# Altium PCB Adapter_UNIT_SPI_TO_INTAN.PcbDoc
Units mil, origin at the board's own origin, x right, y up, seen from the top; angles counter-clockwise.
Board outline 1700 x 695 mil, 4 copper layers (Top Layer, Layer 1, Layer 2, Bottom Layer), stack 29.356 mil thick; 4 components, 28 nets, 64 pads, 0 vias.
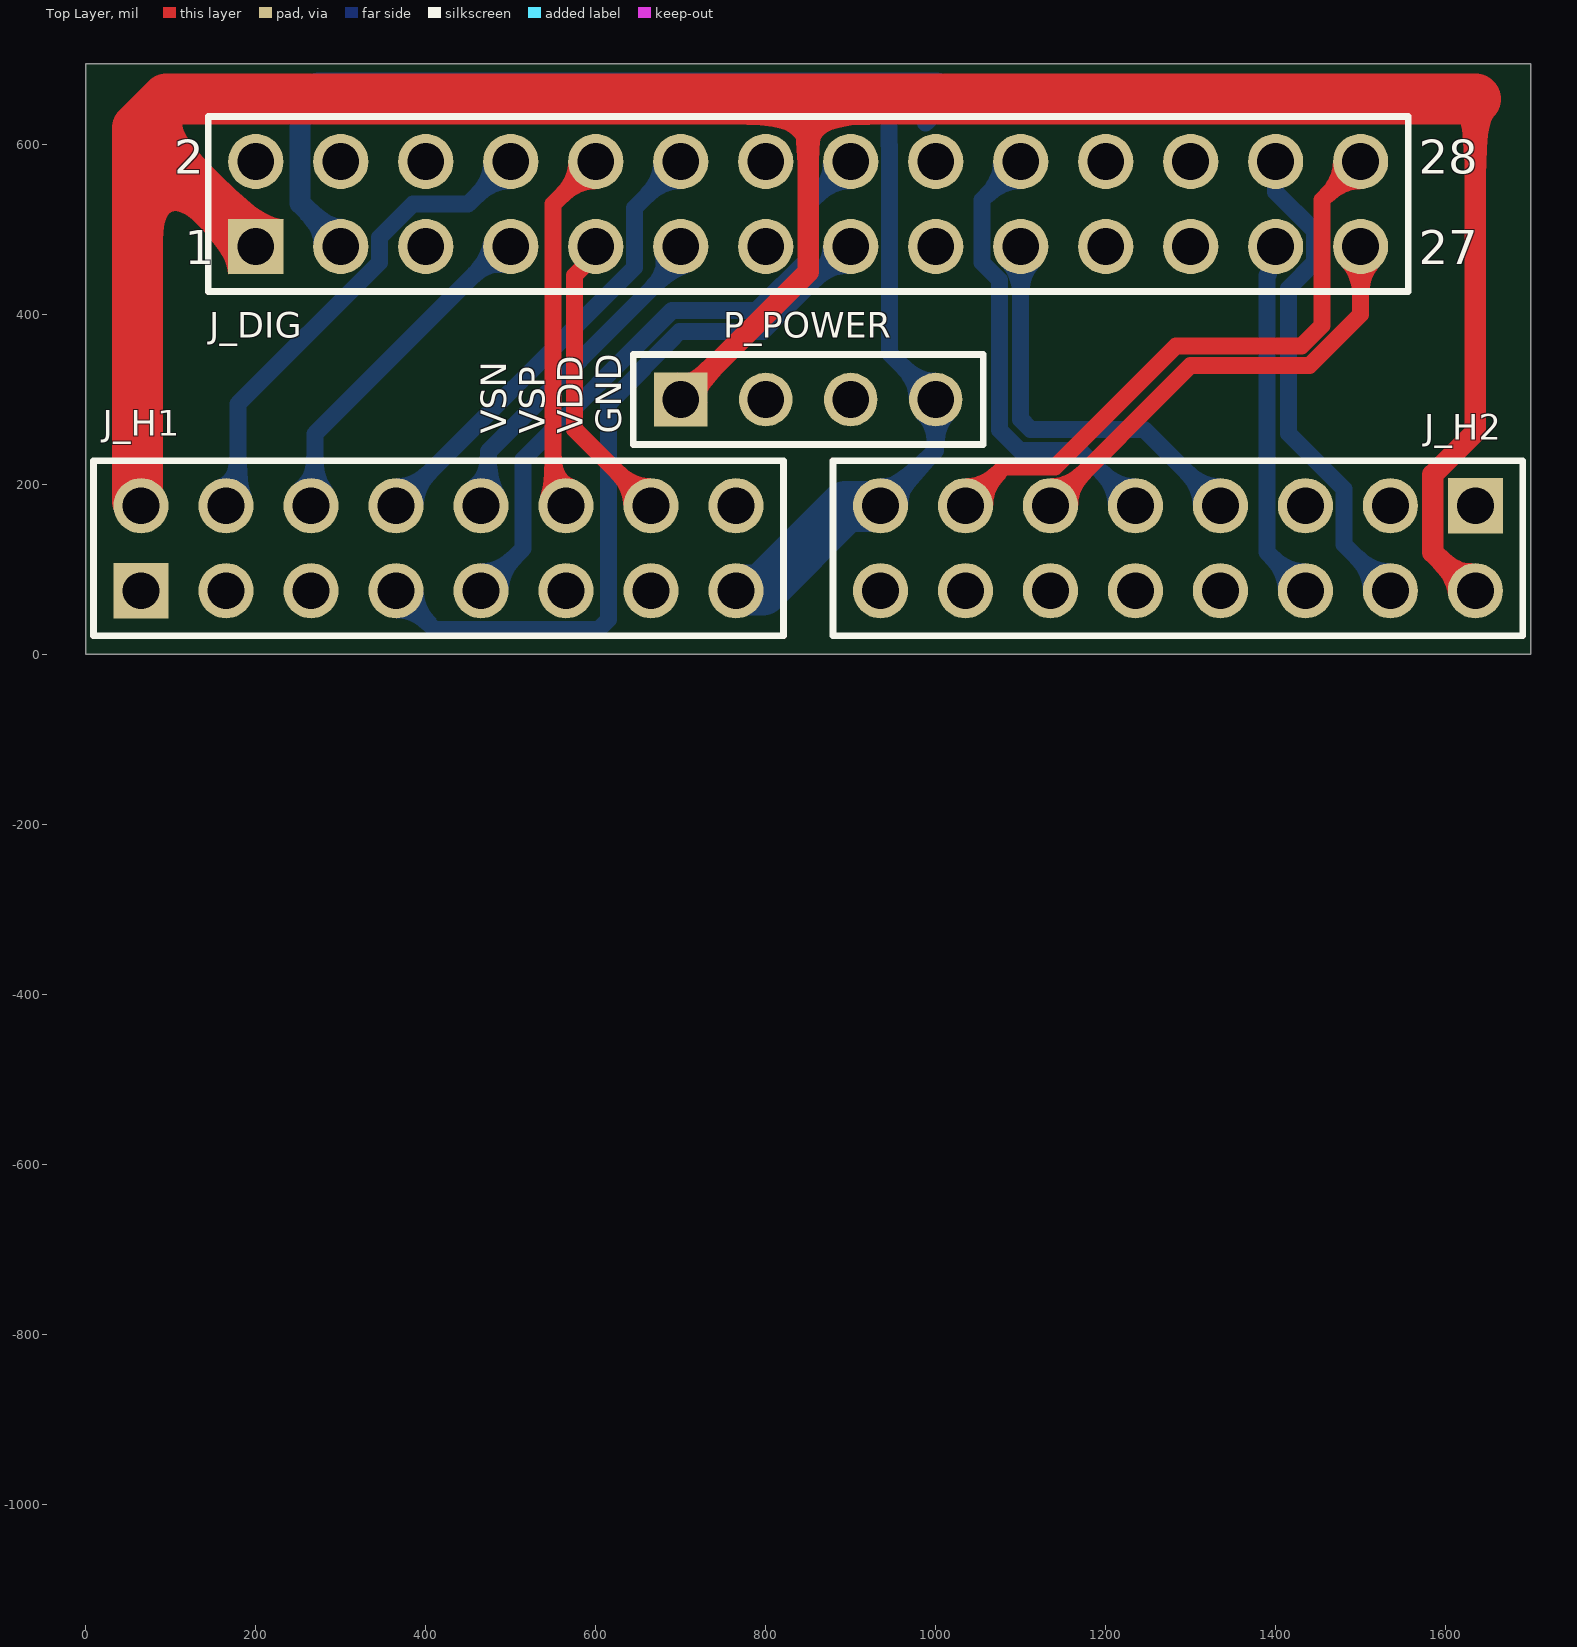
[diagram p0: Top Layer view]
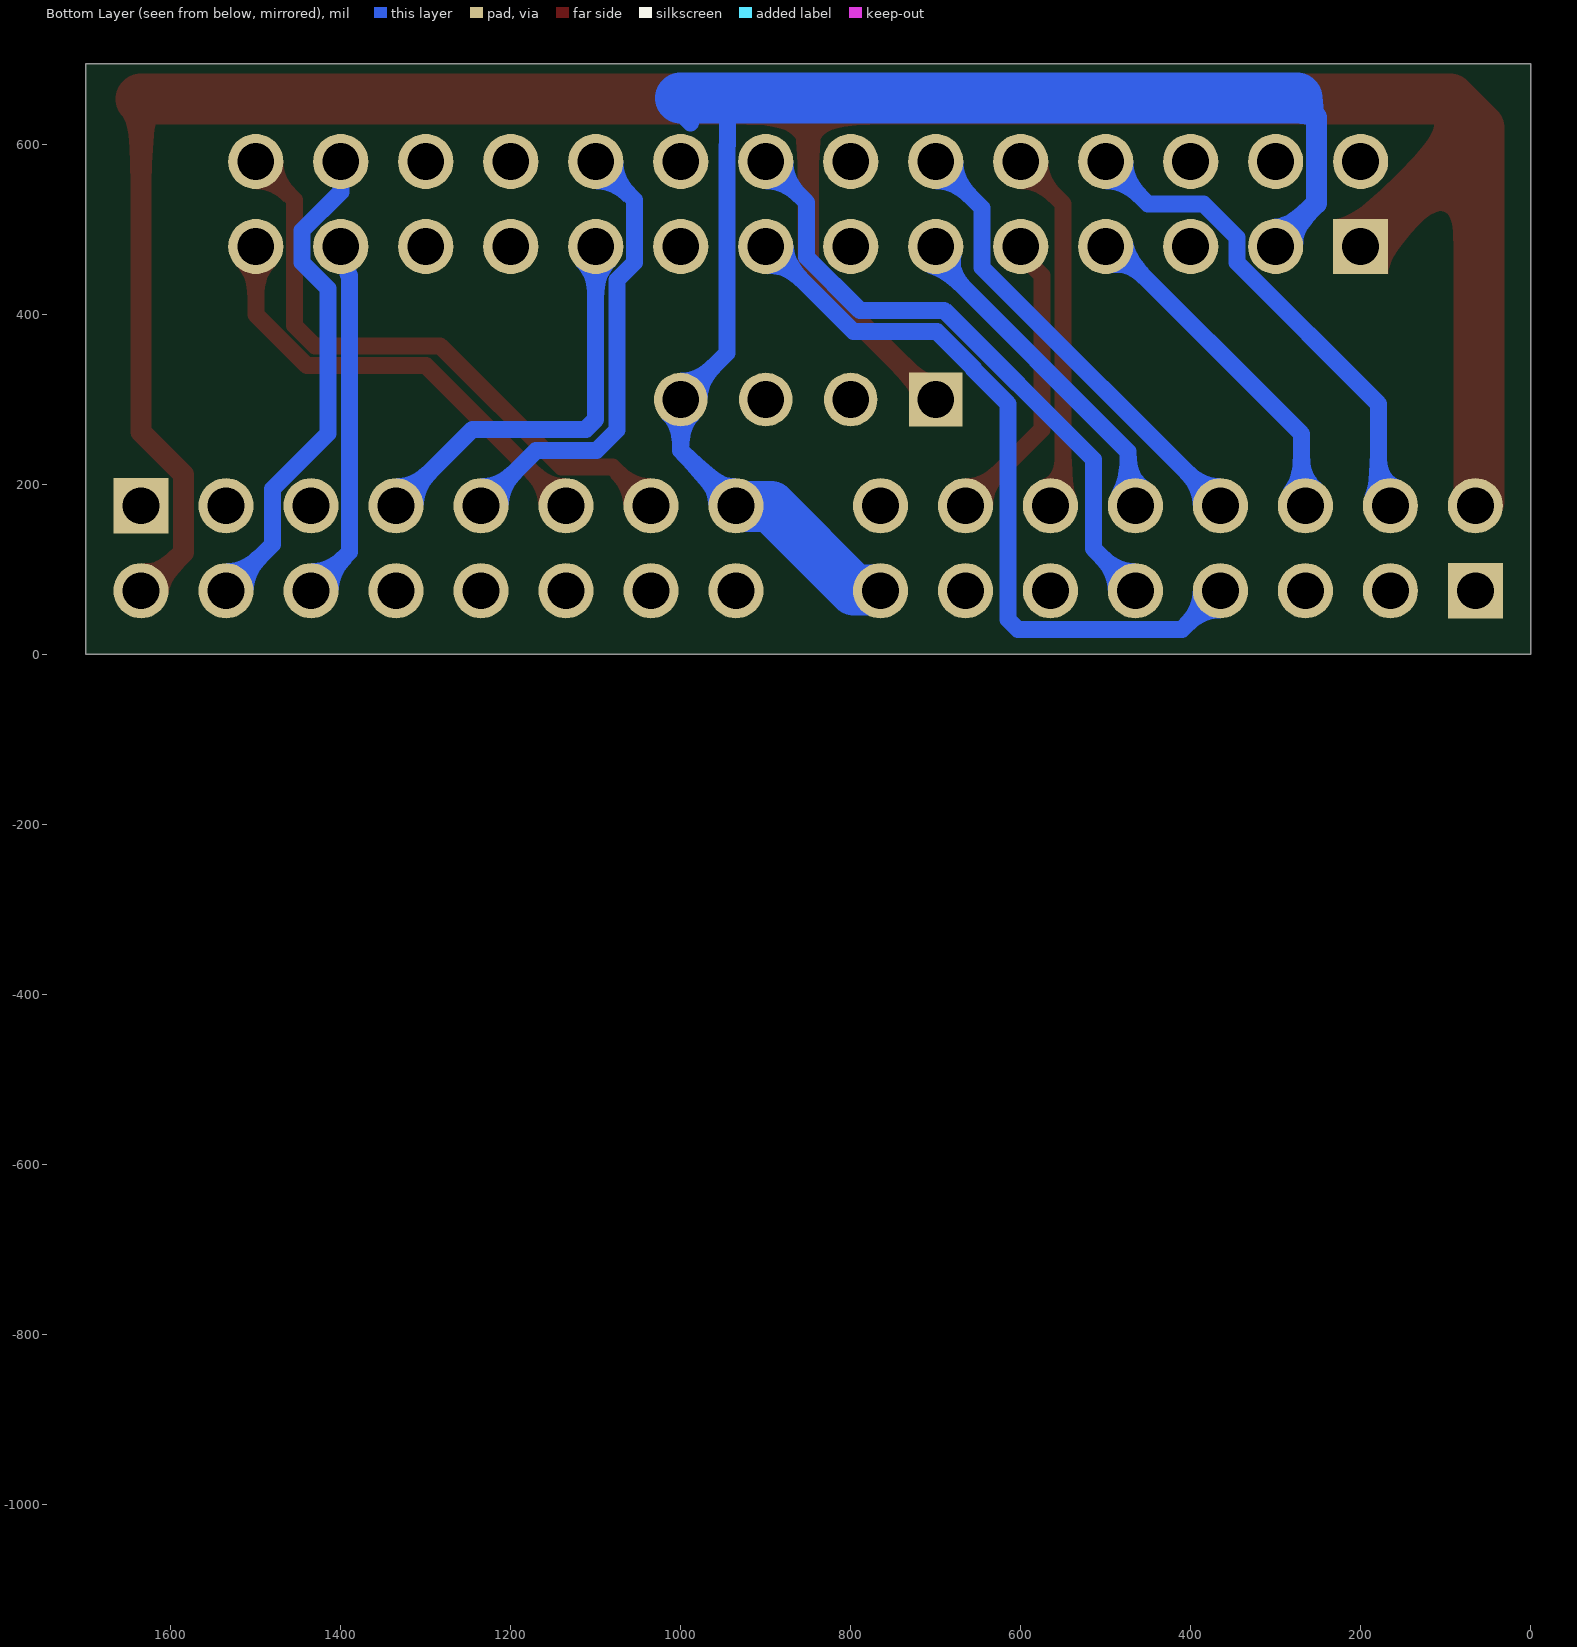
[diagram p1: Bottom Layer view, seen from below]
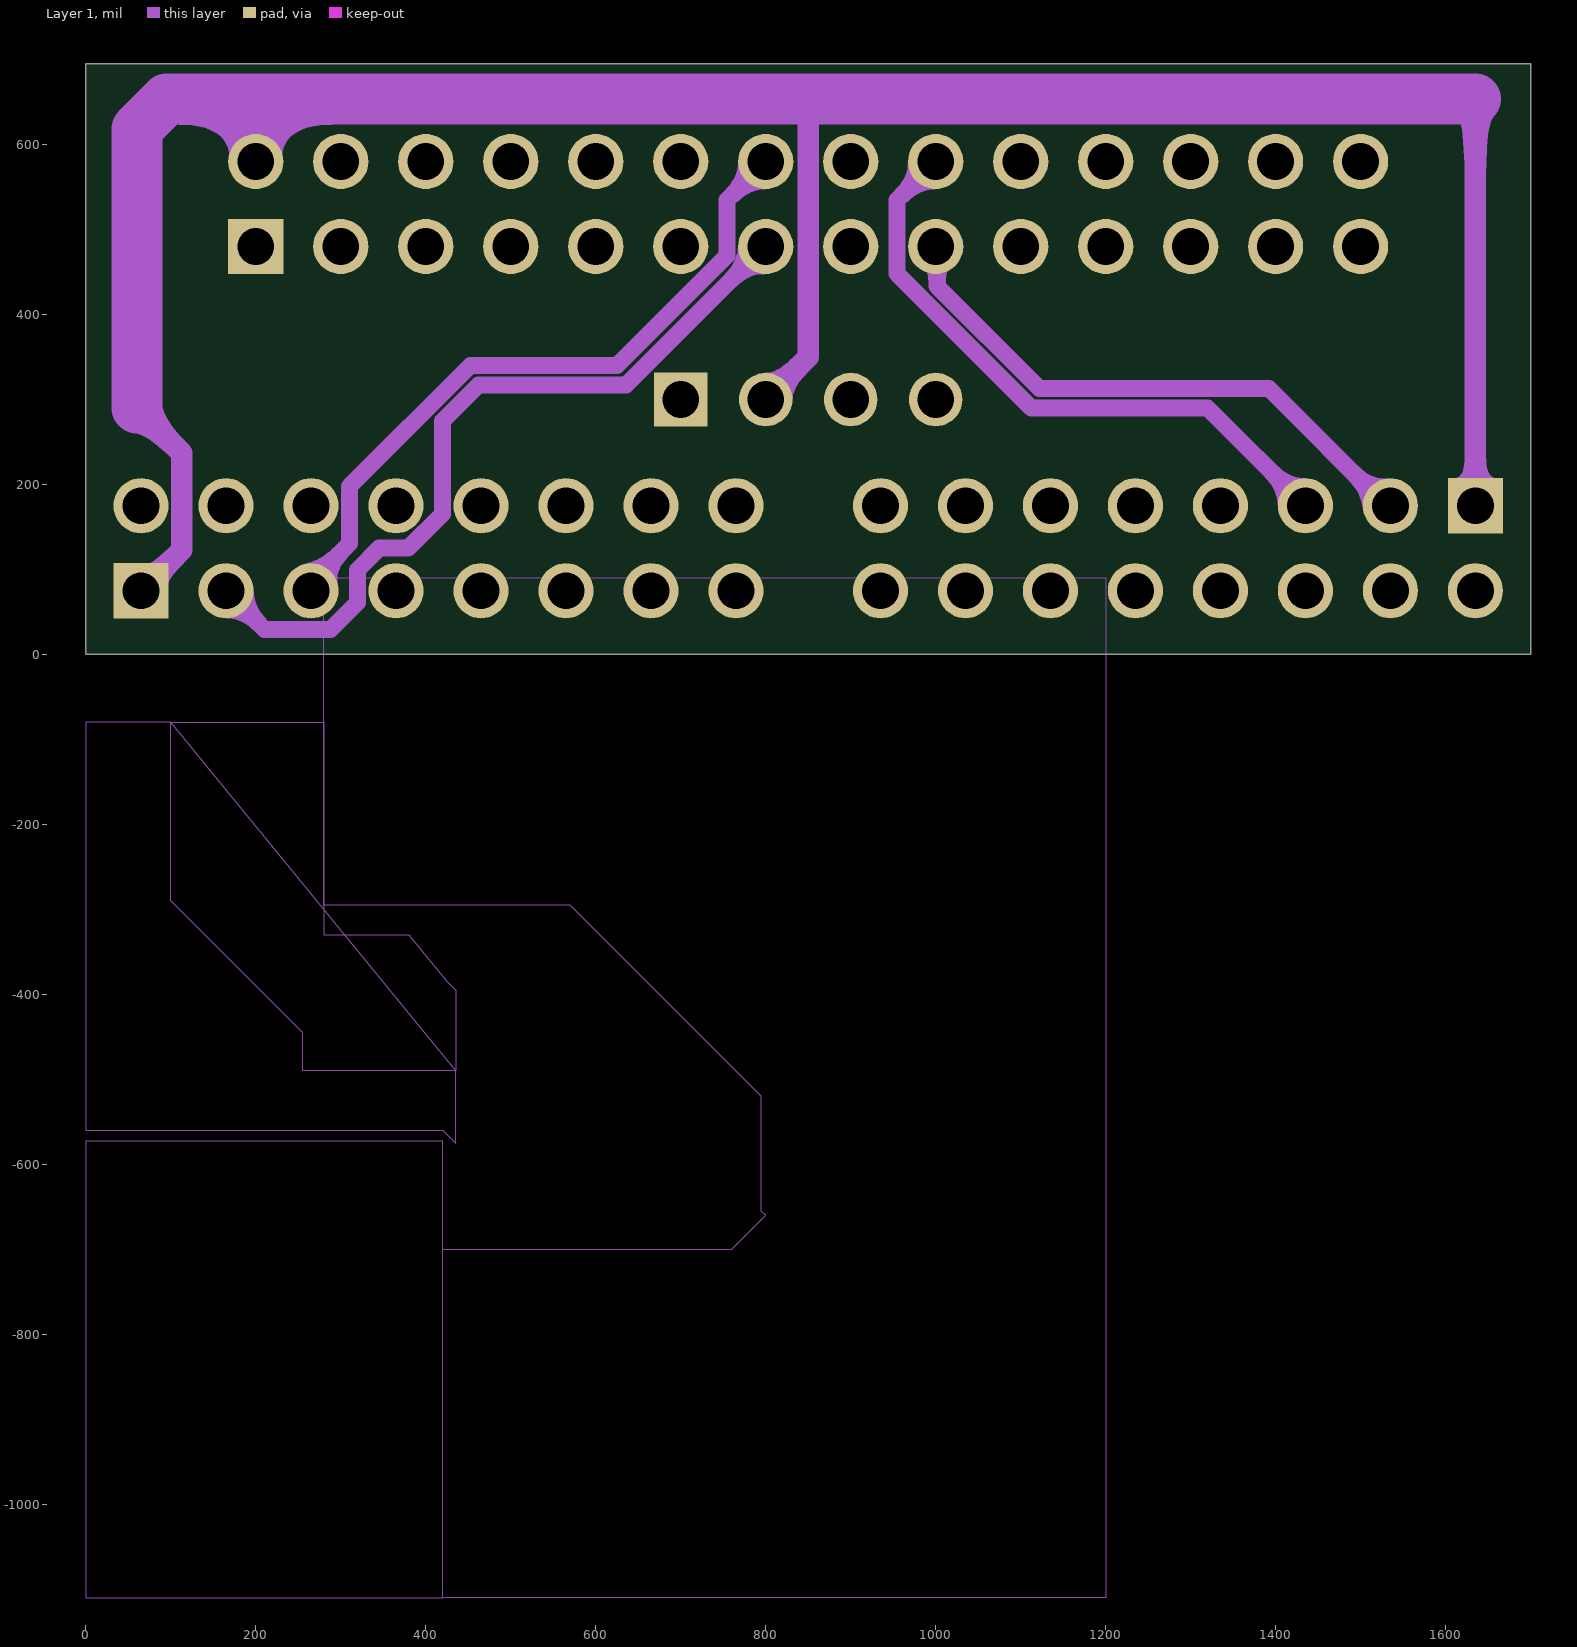
[diagram p2: Layer 1]
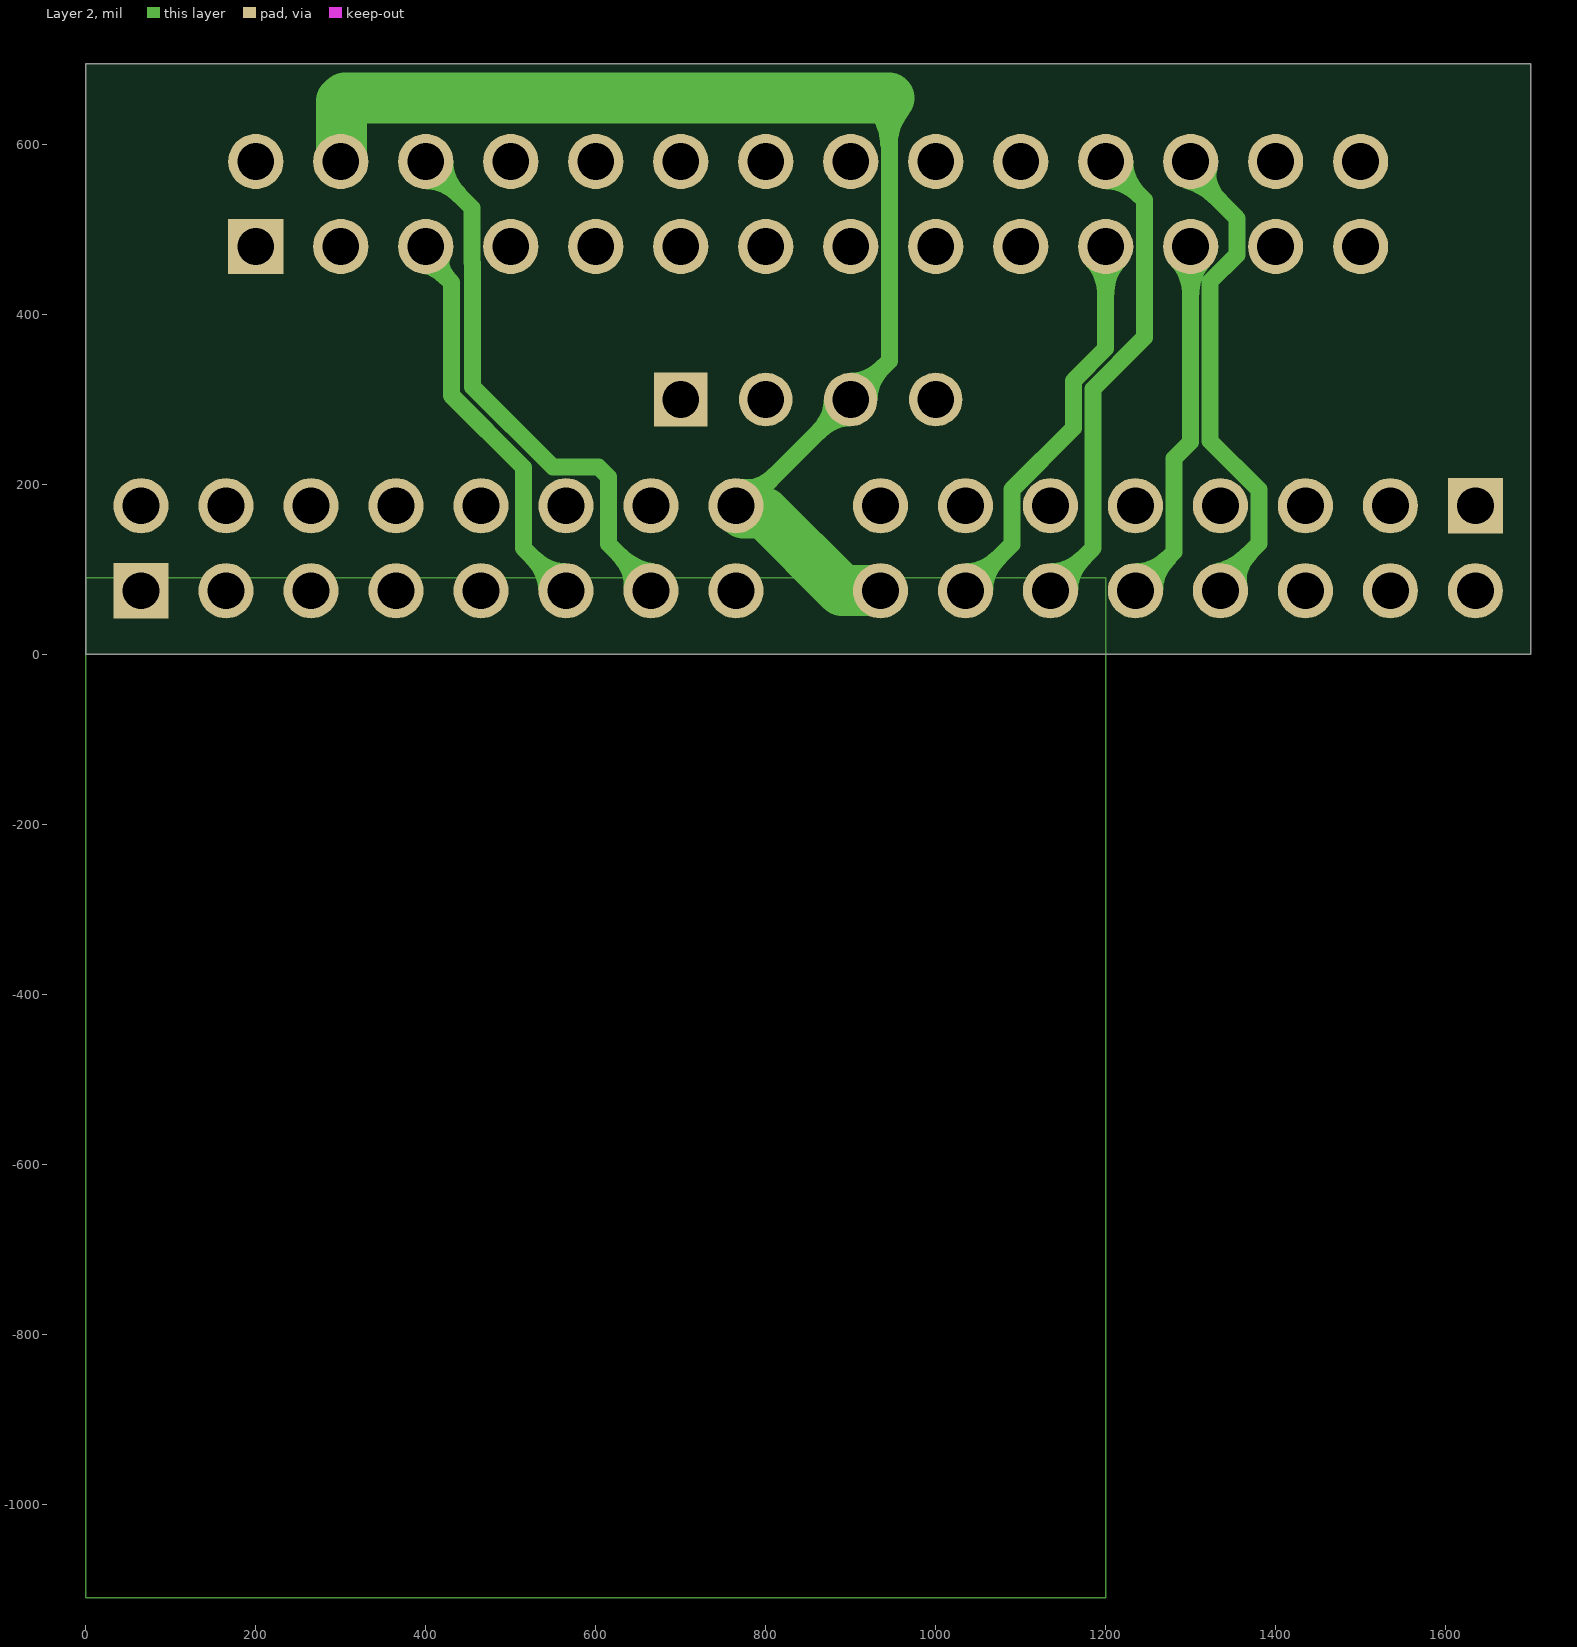
[diagram p3: Layer 2]
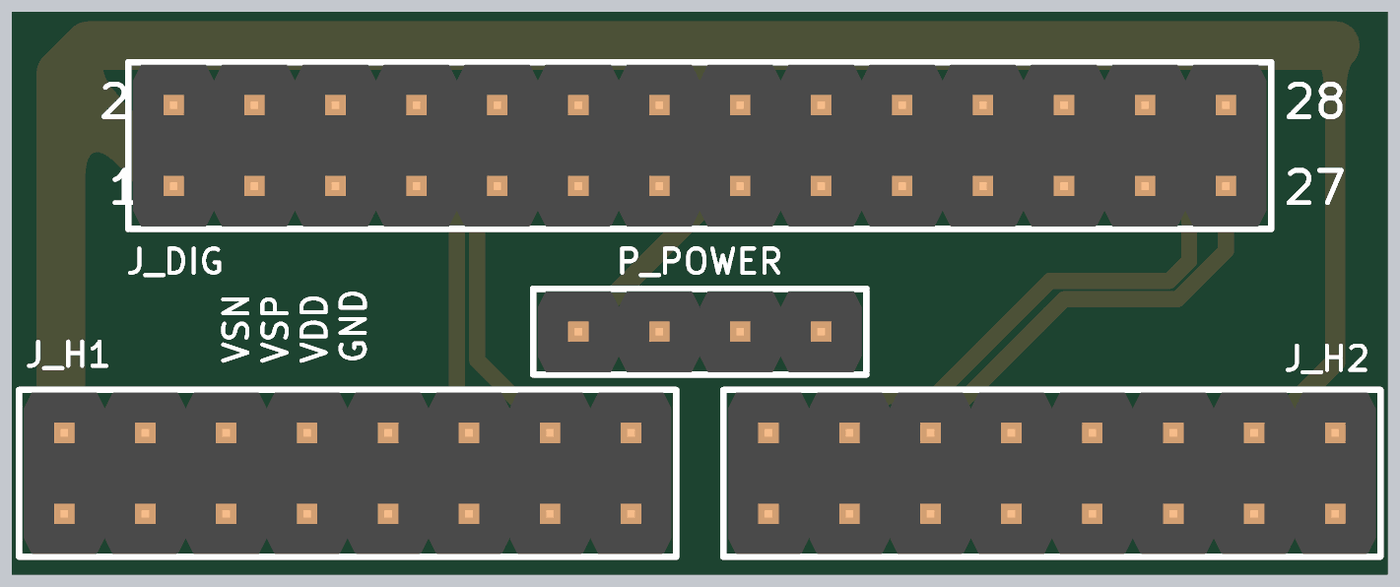
[diagram p4: 3D render of the assembled board from above, using the file's embedded part models]

## Layer stack, top to bottom
Top Solder: solder mask 0.4, Solder Resist, Dk 3.5
Top Layer: signal copper 1.4
Dielectric 4: prepreg 2.8, PP-006, Dk 4.1
Layer 1: signal copper 1.378
Dielectric 2: prepreg 2.8, PP-006, Dk 4.1
Dielectric 1: dielectric 12.6, FR-4, Dk 4.8
Dielectric 3: prepreg 2.8, PP-006, Dk 4.1
Layer 2: signal copper 1.378
Dielectric 5: prepreg 2.8, PP-006, Dk 4.1
Bottom Layer: signal copper 1.4
Bottom Solder: solder mask 0.4, Solder Resist, Dk 3.5

## Board outline
0,0 1700,0 1700,695 0,695

## Design rules (kind name [scope] priority, off if disabled: settings)
BoardOutlineClearance [All] p1: gap=9.84 ignorepadtopadclearanceinfootprint=FALSE
Clearance [All] p1: gap=2.95 ignorepadtopadclearanceinfootprint=FALSE
ComponentClearance [All] p1: gap=3.94 collisioncheckmode=3 verticalgap=3.94 showdistances=FALSE
HoleSize [All] p1: absolutevalues=TRUE maxlimit=100 minlimit=3.94 maxpercent=80.000 minpercent=20.000
HoleToHoleClearance [All] p1: gap=10.83 allowstackedmicrovias=TRUE
MinimumAnnularRing [All] p1: minimumring=3.94
MinimumSolderMaskSliver [All] p1: minsoldermaskwidth=2.95
PlaneClearance [All] p1: clearance=2.95
PlaneConnect [All] p1: planeconnectstyle=Relief reliefexpansion=5.91 reliefentries=4 reliefconductorwidth=2.95 reliefairgap=2.95
PolygonConnect [All] p1: connectstyle=Relief reliefconductorwidth=2.95 reliefentries=4 polygonreliefangle="90 Angle" airgapwidth=2.95
RoomDefinition Adapter_UNIT_SPI_TO_INTAN [InComponentClass('Adapter_UNIT_SPI_TO_INTAN')] p1: confinementstyle=ConfineIn formatcopy=TRUE lockcomponents=FALSE outline 0,-1110 2000,-1110 2000,-110 0,-110
RoutingVias [All] p1: holewidth=9.84 width=23.62 viastyle="Through Hole" minholewidth=3.94 minwidth=7.87 maxholewidth=28 maxwidth=50
SilkToSilkClearance [All] p1: silktosilkclearance=5.91
SilkToSolderMaskClearance [IsPad] p1: minsilkscreentomaskgap=5.91 clearancetoexposedcopper=TRUE
SolderMaskExpansion [All] p1: expansion=2.95 istentingtop=FALSE
Width [All] p1: maxlimit=1968.5 minlimit=2.95 preferedwidth=5.91
22 further rules are at their usual default settings.

## Components (designator, comment, footprint, x,y, rotation, side; value= is the part's Value field where it differs from the comment)
J_DIG "61302821121" 61302821121 850,530 r0 top locked
J_H1 "61301621121" 61301621121 415,125 r0 top locked
J_H2 "61301621121" 61301621121 1285,125 r180 top locked
P_POWER "61300411121" 61300411121 850,300 r0 top

## Footprints (in the part's own frame and the unit in brackets; to place one, negate y for a bottom-side part, rotate by r counter-clockwise, add the part's x,y. Pads: shape width x height; smd on the part's side, far side on the other; paste and mask are expansions set on the pad)
61300411121 [mm] "Pin Header, pitch 2.54 mm, THT, Vertical, single row, 4p"
  rect 1.6x1.6 hole 1.1: 1(-3.81,0)
  round 1.6 hole 1.1: 2(-1.27,0) 3(1.27,0) 4(3.81,0)
  silkscreen extent -5.23,-1.35 5.23,1.35, body extent -5.08,-1.27 5.08,1.27, height 8.57
61301621121 [mm] "Pin Header, pitch 2.54 mm, THT, Vertical, dual row, 16p"
  rect 1.65x1.65 hole 1.1: 1(-8.89,-1.27)
  round 1.65 hole 1.1: 2(-8.89,1.27) 3(-6.35,-1.27) 4(-6.35,1.27) 5(-3.81,-1.27) 6(-3.81,1.27) 7(-1.27,-1.27) 8(-1.27,1.27) 9(1.27,-1.27) 10(1.27,1.27) 11(3.81,-1.27) 12(3.81,1.27) 13(6.35,-1.27) 14(6.35,1.27) 15(8.89,-1.27) 16(8.89,1.27)
  silkscreen extent -10.31,-2.62 10.31,2.62, body extent -10.16,-2.54 10.16,2.54, height 8.59
61302821121 [mm] "Pin Header, pitch 2.54 mm, THT, Vertical, dual row, 28p"
  rect 1.65x1.65 hole 1.1: 1(-16.51,-1.27)
  round 1.65 hole 1.1: 2(-16.51,1.27) 3(-13.97,-1.27) 4(-13.97,1.27) 5(-11.43,-1.27) 6(-11.43,1.27) 7(-8.89,-1.27) 8(-8.89,1.27) 9(-6.35,-1.27) 10(-6.35,1.27) 11(-3.81,-1.27) 12(-3.81,1.27) 13(-1.27,-1.27) 14(-1.27,1.27) 15(1.27,-1.27) 16(1.27,1.27) 17(3.81,-1.27) 18(3.81,1.27) 19(6.35,-1.27) 20(6.35,1.27) 21(8.89,-1.27) 22(8.89,1.27) 23(11.43,-1.27) 24(11.43,1.27) 25(13.97,-1.27) 26(13.97,1.27) 27(16.51,-1.27) 28(16.51,1.27)
  silkscreen extent -17.93,-2.62 17.93,2.62, body extent -17.78,-2.54 17.78,2.54, height 8.59

## Part data
J_DIG: library part CMP-1502-01115-1, "THT Vertical Pin Header WR-PHD, Pitch 2.54 mm, Dual Row, 28 pins", Contact Resistance=20mOhm, Manufacturer="Wurth Elektronik", Operating Temperature=-40to105degC, Rated Current=3A, Withstanding Voltage=500VAC, Working Voltage=250VAC, Datasheet URL=https://katalog.we-online.de/em/datasheet/6130xx21121.pdf, Gender=Male, Manufacturer URL=http://www.we-online.de, Mounting Technology=THT, Orientation=Vertical, Package Reference=61302821121, Packaging=Bag, Part Number=61302821121, Pin Number=28, Pitch=2.54mm, Publisher=WurthElektronik, Row Number=Dual
J_H1 J_H2: library part CMP-1502-01097-1, "THT Vertical Pin Header WR-PHD, Pitch 2.54 mm, Dual Row, 16 pins", Contact Resistance=20mOhm, Manufacturer="Wurth Elektronik", Operating Temperature=-40to105degC, Rated Current=3A, Withstanding Voltage=500VAC, Working Voltage=250VAC, Datasheet URL=https://katalog.we-online.de/em/datasheet/6130xx21121.pdf, Gender=Male, Manufacturer URL=http://www.we-online.de, Mounting Technology=THT, Orientation=Vertical, Package Reference=61301621121, Packaging=Bag, Part Number=61301621121, Pin Number=16, Pitch=2.54mm, Publisher=WurthElektronik, Row Number=Dual
P_POWER: library part CMP-1502-01064-1, "THT Vertical Pin Header WR-PHD, Pitch 2.54 mm, Single Row, 4 pins", Contact Resistance=20mOhm, Manufacturer="Wurth Elektronik", Operating Temperature=-40to105degC, Rated Current=3A, Withstanding Voltage=500VAC, Working Voltage=250VAC, Datasheet URL=https://katalog.we-online.de/em/datasheet/6130xx11121.pdf, Gender=Male, Manufacturer URL=http://www.we-online.de, Mounting Technology=THT, Orientation=Vertical, Package Reference=61300411121, Packaging=Bag, Part Number=61300411121, Pin Number=4, Pitch=2.54mm, Publisher=WurthElektronik, Row Number=Single

## Nets (pads, with @x,y where several pads share a name; then routed paths per layer and width w, separated by ;. In a path a pad name is that pad's centre, name@x,y a point inside that pad or via, vN(x,y) a via of type N, cw(c..) or ccw(c..) an arc to the next point about the centre after c; other vN are vias at no path point)
H1_B1: J_DIG.1 J_H1.2 J_H2.2 P_POWER.1 | length 3269.6
  Top Layer w25: P_POWER.1 850,450 850,653.45 ; J_H2.2 1630,75 1585,120 1585,211.81 1635,261.81 1635,653.45
  Top Layer w60: J_H1.2 65,176.34 60.78,180.56 60.78,619.22 ; J_DIG.1 60.78,619.22 ; 1635,653.45 850,653.45 95.01,653.45 60.78,619.22
H1_B2: J_DIG.8 J_H1.4 | length 581.8
  Bottom Layer w20: J_H1.4 165,187.17 179.18,201.35 179.18,294.93 345.43,461.18 345.43,490.43 385,530 450,530 J_DIG.8
H1_B3: J_DIG.7 J_H1.6 | length 408.2
  Bottom Layer w20: J_H1.6 269.65,179.65 269.65,259.65 490,480 J_DIG.7
H1_B4: J_DIG.12 J_H1.8 | length 543.8
  Bottom Layer w20: J_H1.8 645.43,455.43 645.43,525.43 J_DIG.12
H1_B5: J_DIG.11 J_H1.10 | length 402.3
  Bottom Layer w20: J_H1.10 473.6,183.6 473.6,238.6 691.4,456.4 691.4,471.4 J_DIG.11
H1_B6: J_DIG.10 J_H1.12 | length 431.9
  Top Layer w20: J_H1.12 565,187.17 550,202.17 550,530 J_DIG.10
H1_B7: J_DIG.9 J_H1.14 | length 352.6
  Top Layer w20: J_DIG.9 600,470.8 575,445.8 575,265 J_H1.14
H1_B8: J_DIG.4 J_H1.16 J_H2.16 P_POWER.3 | length 1479.3
  Layer 2 w20: J_H1.16@775,175 P_POWER.3 945.43,345.43 945.43,598.82 945,599.25 945,655
  Layer 2 w35: J_H1.16 J_H1.16@773.6,166.4
  Layer 2 w60: J_DIG.4 300.95,580.95 300.95,650.95 305,655 945,655 ; J_H1.16@773.6,166.4 798.6,166.4 890,75 J_H2.16
H1_T1: J_DIG.2 J_H1.1 J_H2.1 P_POWER.2 | length 3104.8
  Layer 1 w25: 60,290 112.93,237.07 112.93,122.93 J_H1.1 ; P_POWER.2 850,350 850,643.45 860,653.45 ; J_H2.1 1635,653.45
  Layer 1 w60: 60,290 60,618.3 95.15,653.45 200,653.45 ; J_DIG.2 200,653.45 ; 1635,653.45 860,653.45 200,653.45
H1_T2: J_DIG.13 J_H1.3 | length 926.8
  Layer 1 w20: J_H1.3 210.43,29.57 287.85,29.57 319.57,61.28 319.57,99.57 345,125 379.25,125 419.57,165.31 419.57,274.57 462.05,317.05 635.74,317.05 798.69,480 J_DIG.13
H1_T3: J_DIG.14 J_H1.5 | length 827.6
  Layer 1 w20: J_H1.5 265,85 310.43,130.43 310.43,197.89 452.54,340 625,340 754.57,469.57 754.57,534.57 J_DIG.14
H1_T4: J_DIG.15 J_H1.7 | length 889.8
  Bottom Layer w20: J_H1.7 410.43,29.57 603.28,29.57 615,41.28 615,295 655.55,335.55 655.55,336.86 687.07,368.38 698.69,380 796.71,380 896.71,480 J_DIG.15
H1_T5: J_DIG.16 J_H1.9 | length 743.3
  Bottom Layer w20: J_H1.9 514.46,124.46 514.46,229.46 690,405 789.25,405 852.07,467.81 852.07,532.07 J_DIG.16
H1_T6: J_DIG.5 J_H1.11 | length 461.2
  Layer 2 w20: J_DIG.5@400,467.83 430,437.83 430,305 515,220 515,125 J_H1.11
H1_T7: J_DIG.6 J_H1.13 | length 646.2
  Layer 2 w20: J_DIG.6 454.57,525.43 454.57,461.18 455,460.75 455,315 549.57,220.43 603.28,220.43 615,208.72 615,130 665,80 J_H1.13
H1_T8: J_DIG.3 J_H1.15 J_H2.15 P_POWER.4 | length 1685.3
  Bottom Layer w20: J_H2.15 1000,240 P_POWER.4@1000,310 ; 945,625.43 945,599.25 945.43,598.82 945.43,354.57 P_POWER.4 ; 988.28,625.43 1000,637.15 1000,655
  Bottom Layer w25: 275,655 252.07,632.07 252.07,531.03 300,483.1 J_DIG.3
  Bottom Layer w60: 275,655 945,655 981.18,655 988.28,655 1000,655 ; J_H1.15 765.95,75.95 795.95,75.95 894.05,174.05 934.05,174.05 J_H2.15
H2_B2: J_DIG.26 J_H2.4 | length 586.1
  Bottom Layer w20: J_DIG.26 1400,544.25 1445.43,498.82 1445.43,461.18 1415,430.75 1415,260 1480.43,194.57 1480.43,129.57 J_H2.4
H2_B3: J_DIG.25 J_H2.6 | length 428.1
  Bottom Layer w20: J_DIG.25 1391.4,471.4 1391.4,447.63 1389.57,445.8 1389.57,120.43 J_H2.6
H2_B4: J_DIG.24 J_H2.8 | length 583.3
  Layer 2 w20: J_DIG.24 1300,567.83 1354.57,513.27 1354.57,470.31 1322.95,438.7 1322.95,251.3 1380.43,193.82 1380.43,130.43 1335,85 J_H2.8
H2_B5: J_DIG.23 J_H2.10 | length 431.9
  Layer 2 w20: J_H2.10 1280.43,120.43 1280.43,230.43 1300,250 J_DIG.23
H2_B6: J_DIG.22 J_H2.12 | length 569.6
  Layer 2 w20: J_H2.12 1185,125 1185,312.54 1245.43,372.97 1245.43,534.57 J_DIG.22
H2_B7: J_DIG.21 J_H2.14 | length 473.3
  Layer 2 w20: J_H2.14 1089.57,129.57 1089.57,193.82 1162.05,266.3 1162.05,322.05 1200,360 J_DIG.21
H2_T2: J_DIG.17 J_H2.3 | length 687.7
  Layer 1 w20: J_DIG.17 1001.68,478.32 1001.68,433.32 1122.05,312.95 1392.05,312.95 1530,175 J_H2.3
H2_T3: J_DIG.18 J_H2.5 | length 744.3
  Layer 1 w20: J_DIG.18 954.57,534.57 954.57,447.97 1112.54,290 1320,290 J_H2.5
H2_T4: J_DIG.19 J_H2.7 | length 480.4
  Bottom Layer w20: J_DIG.19 1100,276.72 1111.72,265 1245,265 J_H2.7
H2_T5: J_DIG.20 J_H2.9 | length 540
  Bottom Layer w20: J_DIG.20 1054.57,534.57 1054.57,461.18 1075,440.75 1075,264.26 1099.26,240 1170,240 J_H2.9
H2_T6: J_DIG.27 J_H2.11 | length 538.2
  Top Layer w20: J_H2.11 1300,340 1440,340 1500,400 J_DIG.27
H2_T7: J_DIG.28 J_H2.13 | length 719.2
  Top Layer w20: J_H2.13 1080.43,220.43 1140.43,220.43 1282.95,362.95 1430.49,362.95 1454.57,387.03 1454.57,534.57 J_DIG.28

## Polygon pours and split planes (outlines as drawn)
no net on Layer 2 "NONET_L03_P002" (solid, shelved, pour order 2): 740,-910
no net on Layer 2 "NONET_L03_P001" (solid, shelved, pour order 1): 0,90 1200,90 1200,-1110 0,-1110
no net on Layer 2 "NONET_L03_P000" (solid, shelved, pour order 0): 0,90 0,-1110 1200,-1110 1200,-1080 1200,90
no net on Layer 1 "NONET_L02_P006" (solid, shelved, pour order 6): 100,-80 0,-80 0,-560 420,-560 435,-575 435,-490
no net on Layer 1 "NONET_L02_P005" (solid, shelved, pour order 5): 280,-80 280,-330 380,-330 425,-385 435,-395 435,-490 255,-490 255,-445 100,-290 100,-80
no net on Layer 1 "NONET_L02_P004" (solid, shelved, pour order 4): 420,-700 760,-700 800,-660 795,-655 795,-520 570,-295 280,-295 280,90 1200,90 1200,-1110 420,-1110
no net on Layer 1 "NONET_L02_P003" (solid, shelved, pour order 3): 0,-572.71 0,-1110 420,-1110 420,-572.71

## Silkscreen, mask and mechanical layers (free items; w line width, h text height)
Top Overlay:
  text "VSN / VSP / VDD / GND" at 630,260 h30 r90
Top Assembly:
  lines w7.8: 0,0 0,695 1700,695 1700,0

## Text inside footprints (layer, text, board x,y; h text height)
J_DIG: Top Overlay "27" at 1568.11,459.13 h40; Top Overlay "28" at 1568.11,565.43 h40; Top Overlay "1" at 116.14,459.13 h40; Top Overlay "2" at 104.33,565.43 h40